# EAGLE board sketchv2.0 (EAGLE 7.6.0)
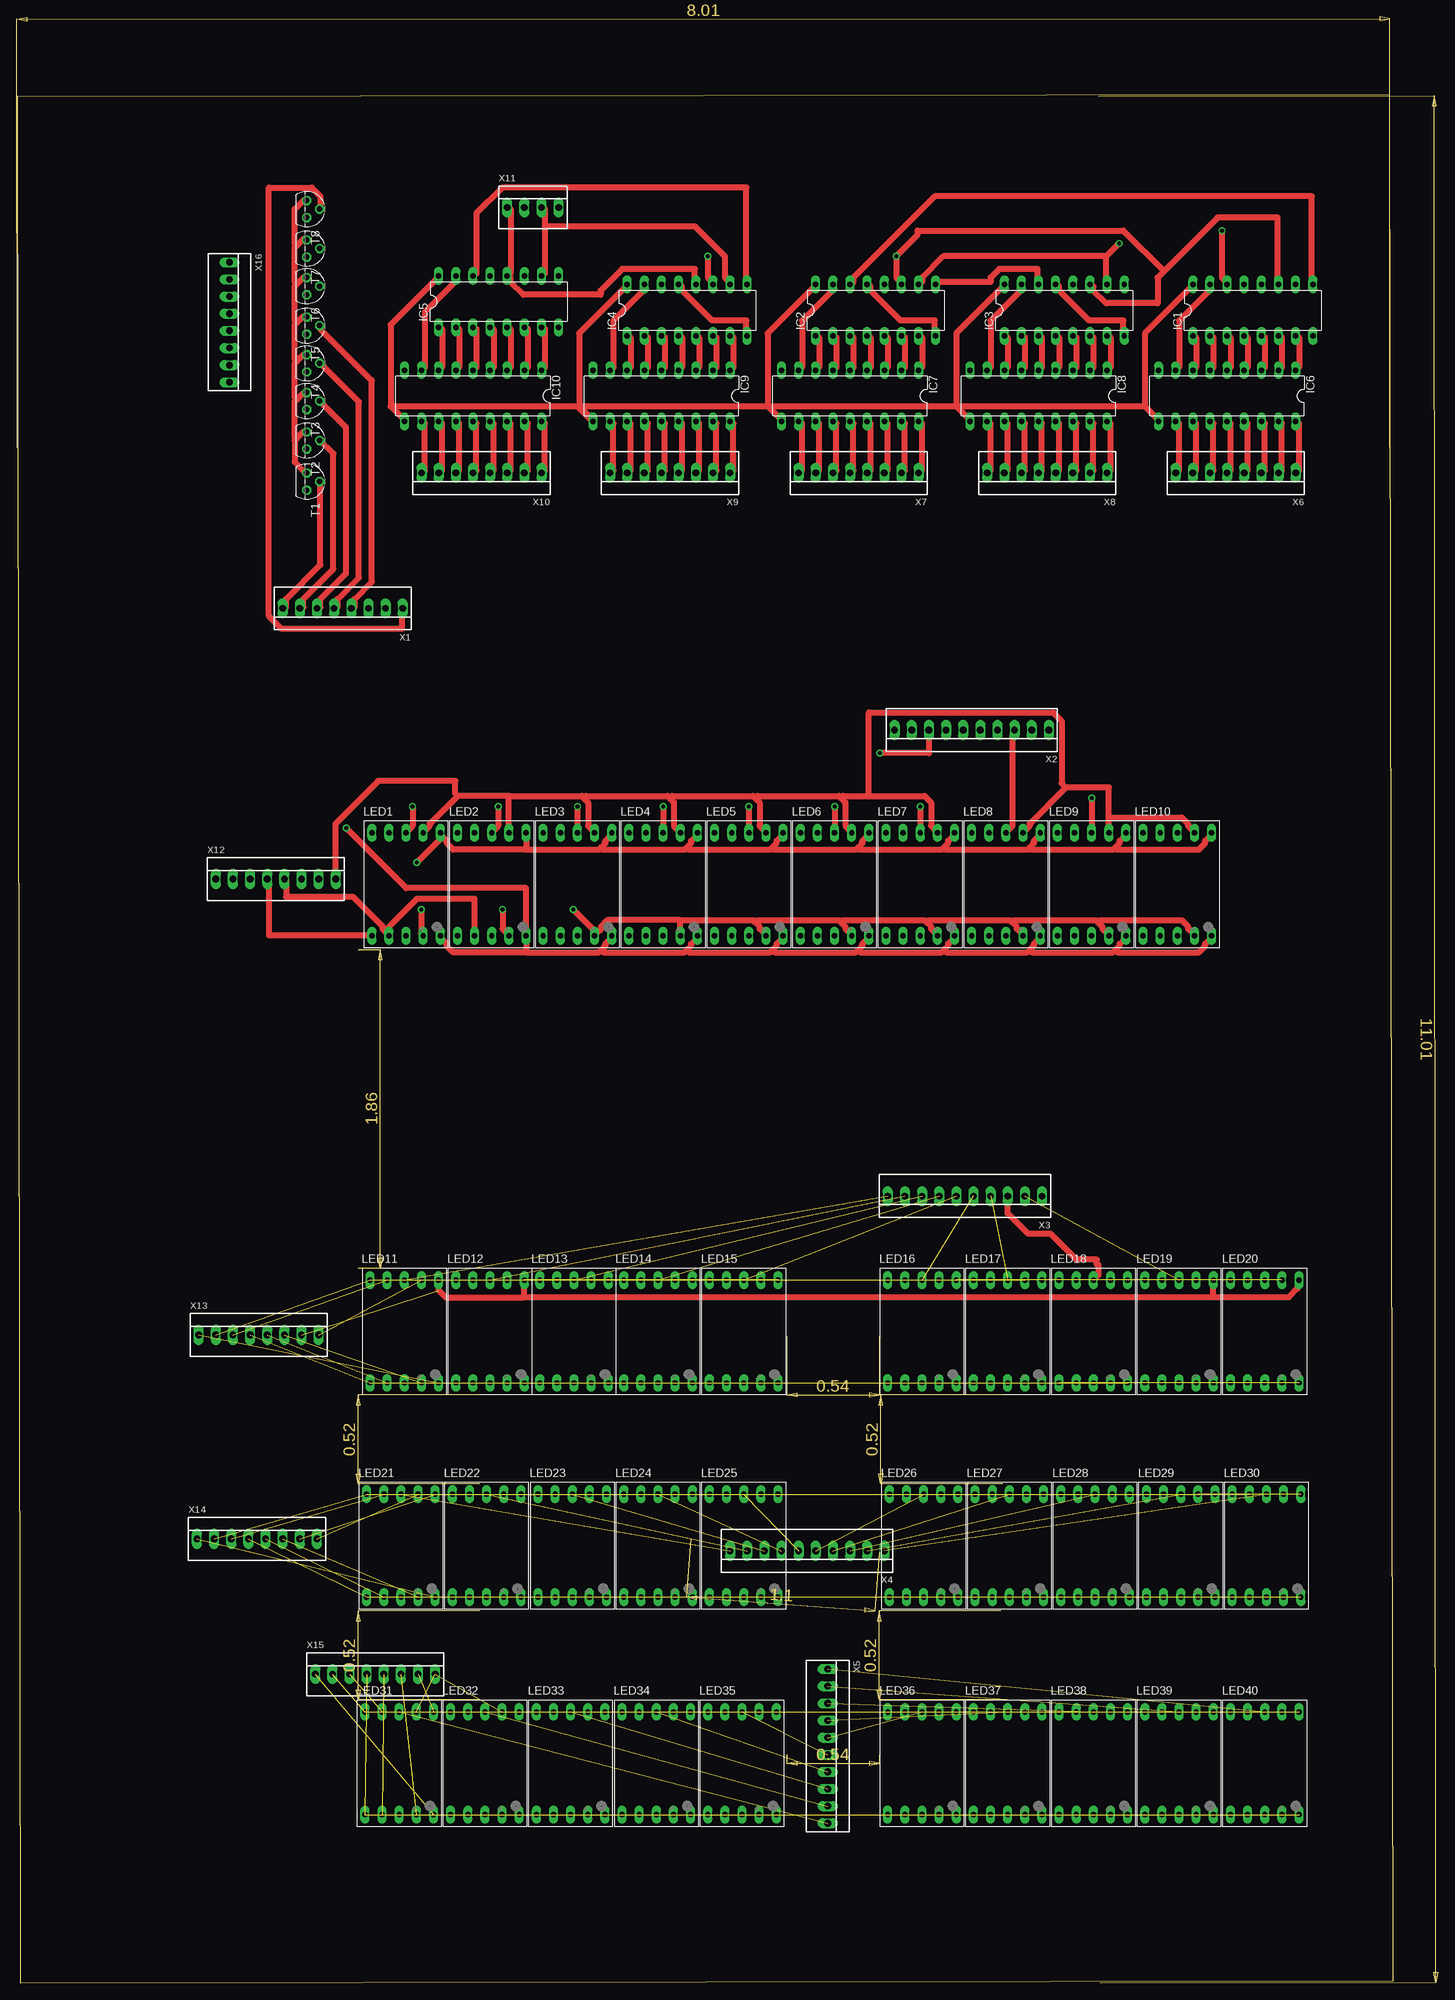
[diagram p0: board, top side]
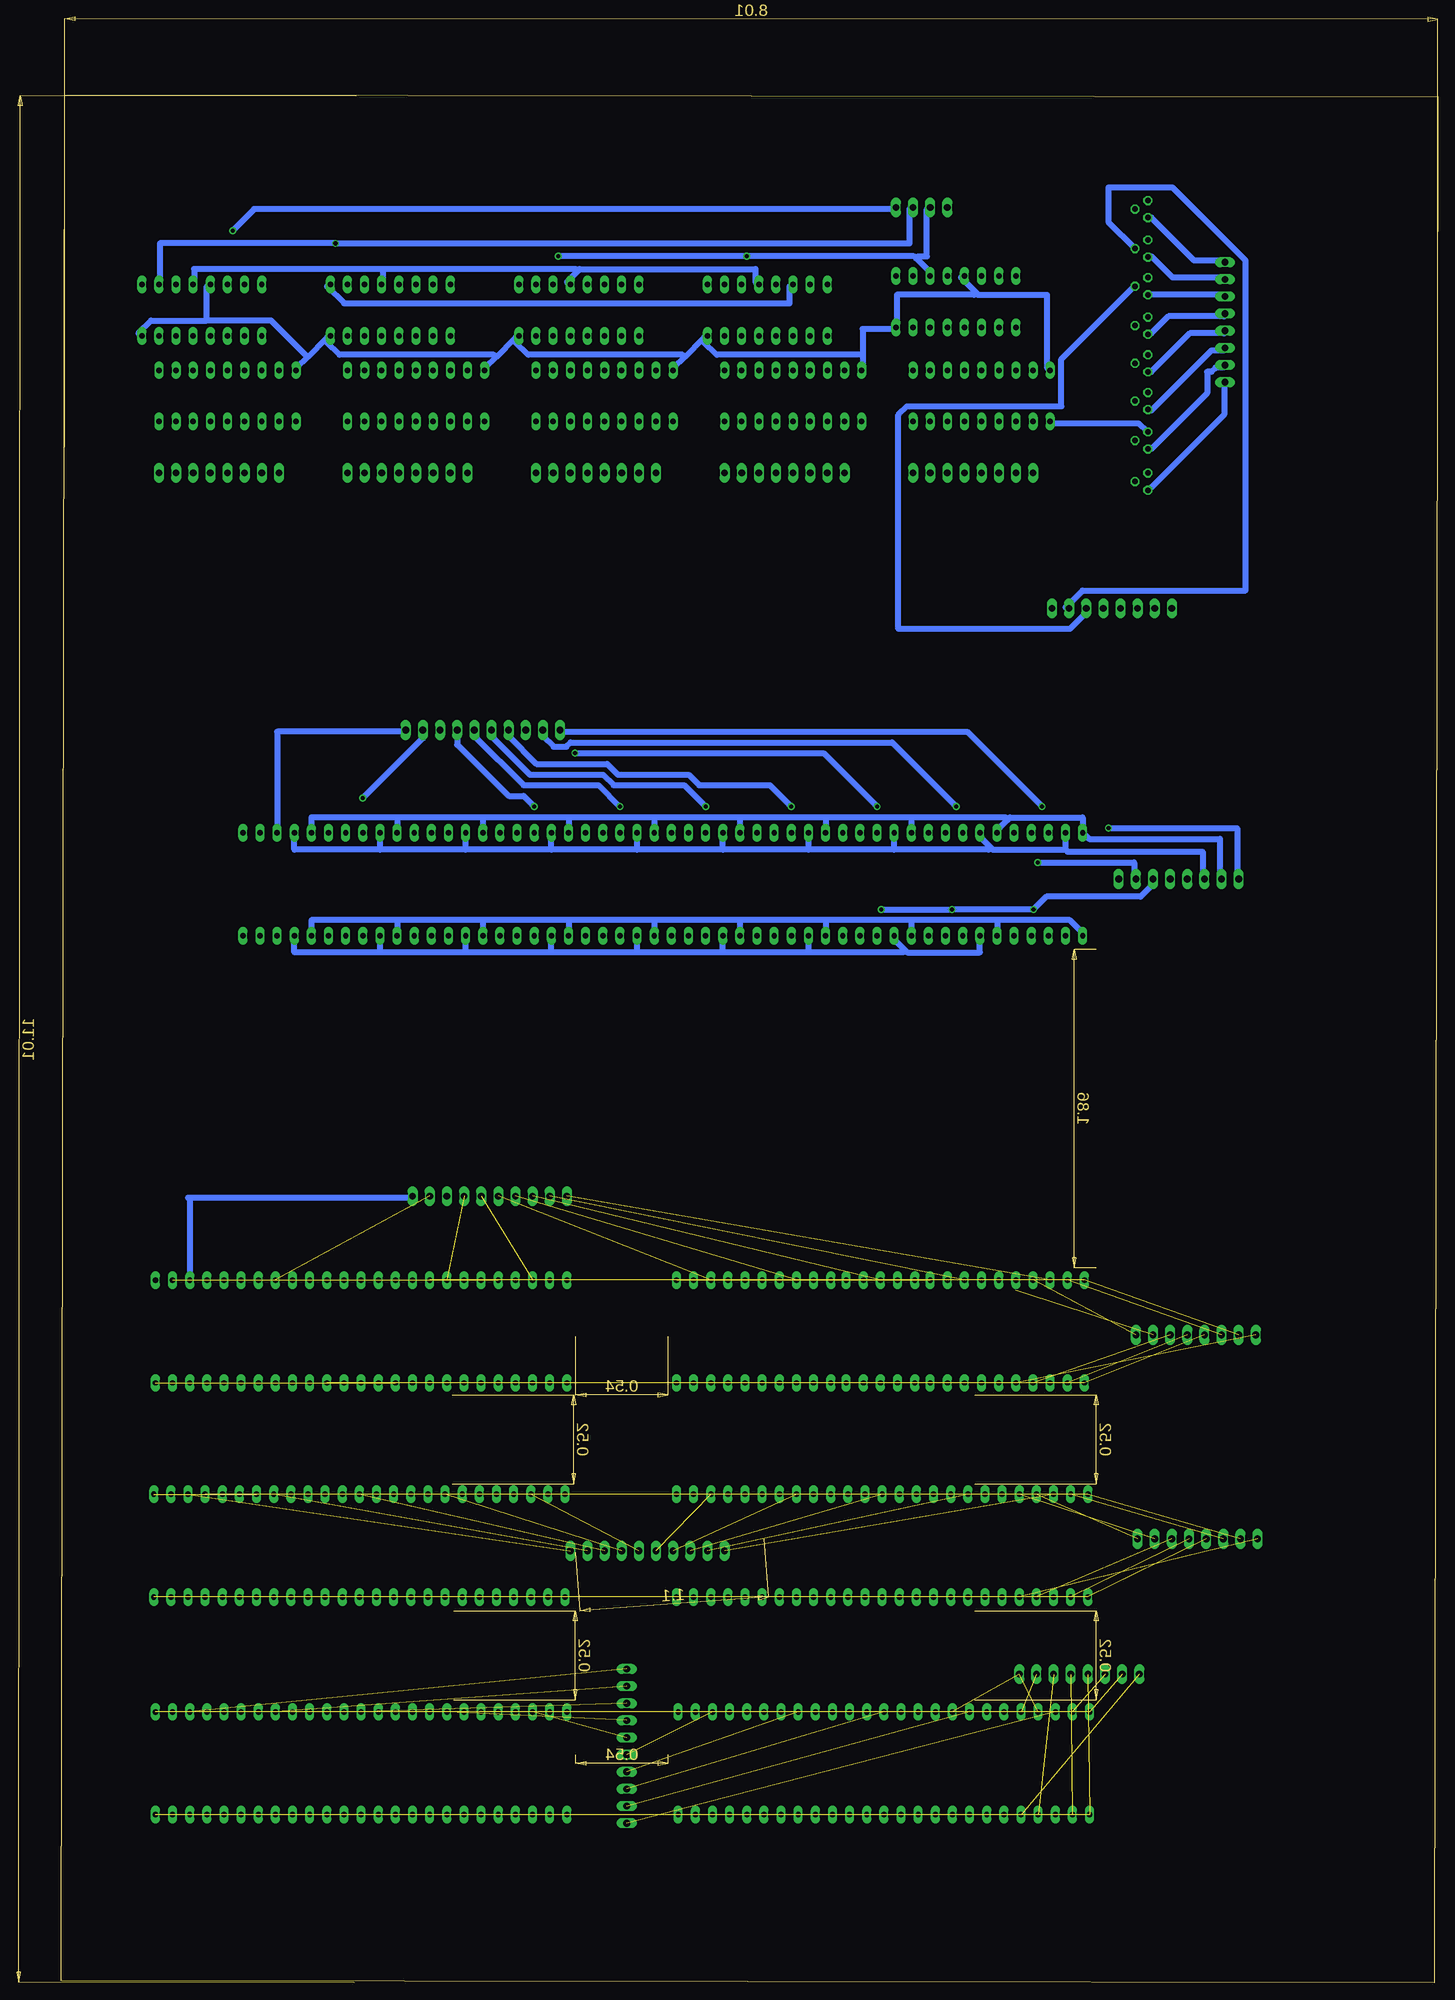
[diagram p1: board, bottom side, seen from below]

Size 203.94 x 279.83 mm. Coordinates in mm from the lower left corner, seen from the top.
Outline: 0.51,0 203.94,0.25 203.43,279.83 0,279.58 0.51,0
Copper layers (1*16): Top 0.035mm / dielectric 1.5mm / Bottom 0.035mm
Design rules "default": minimum track width 10mil, minimum drill 24mil, track to track 8mil, track to pad 8mil, pad to pad 8mil, via to via 8mil, smd to smd 8mil, copper to edge 40mil, drill to drill 8mil, minimum pad ring 10mil, minimum via ring 8mil, stop-mask expansion 4mil, vias tented up to drill 0mil, thermal gap 10mil
Net classes: 0 default: width 0.914 mm, clearance 0.457 mm
tRestrict: area 0,4.3 to 205.5,78; area 1.8,187.7 to 202.4,271.5
bRestrict: area 0,5.8 to 204,77.2; area -1.8,190.5 to 201.7,273.8

## Footprints (pad centres in the part's own frame; a part is rotated, then mirrored left to right if it is on the bottom)
DIL16 = drill 0.813 long: 1 -8.89,-3.81; 2 -6.35,-3.81; 3 -3.81,-3.81; 4 -1.27,-3.81; 5 1.27,-3.81; 6 3.81,-3.81; 7 6.35,-3.81; 8 8.89,-3.81; 9 8.89,3.81; 10 6.35,3.81; 11 3.81,3.81; 12 1.27,3.81; 13 -1.27,3.81; 14 -3.81,3.81; 15 -6.35,3.81; 16 -8.89,3.81
DIL18 = drill 0.813 long: 1 -10.16,-3.81; 2 -7.62,-3.81; 3 -5.08,-3.81; 4 -2.54,-3.81; 5 0,-3.81; 6 2.54,-3.81; 7 5.08,-3.81; 8 7.62,-3.81; 9 10.16,-3.81; 10 10.16,3.81; 11 7.62,3.81; 12 5.08,3.81; 13 2.54,3.81; 14 0,3.81; 15 -2.54,3.81; 16 -5.08,3.81; 17 -7.62,3.81; 18 -10.16,3.81
SA56-11 = drill 0.8 long: 1 -5.08,-7.62; 2 -2.54,-7.62; 3 0,-7.62; 4 2.54,-7.62; 5 5.08,-7.62; 6 5.08,7.62; 7 2.54,7.62; 8 0,7.62; 9 -2.54,7.62; 10 -5.08,7.62
TO92 = drill 0.813 octagon: 1 1.27,0; 2 0,1.905; 3 -1.27,0
22-23-2081 = drill 1 long: 1 -8.89,0; 2 -6.35,0; 3 -3.81,0; 4 -1.27,0; 5 1.27,0; 6 3.81,0; 7 6.35,0; 8 8.89,0
22-23-2101 = drill 1 long: 1 -11.43,0; 2 -8.89,0; 3 -6.35,0; 4 -3.81,0; 5 -1.27,0; 6 1.27,0; 7 3.81,0; 8 6.35,0; 9 8.89,0; 10 11.43,0
22-23-2041 = drill 1 long: 1 -3.81,0; 2 -1.27,0; 3 1.27,0; 4 3.81,0

## Placement (x,y rotation side)
IC1  74HC595N  [DIL16]  183.13,247.9 0 top
IC2  74HC595N  [DIL16]  127.25,247.9 0 top
IC3  74HC595N  [DIL16]  155.19,247.9 0 top
IC4  74HC595N  [DIL16]  99.31,247.9 0 top
IC5  74HC595N  [DIL16]  71.37,249.17 0 top
IC6  [DIL18]  179.32,235.2 180 top
IC7  [DIL18]  123.44,235.2 180 top
IC8  [DIL18]  151.38,235.2 180 top
IC9  [DIL18]  95.5,235.2 180 top
IC10  [DIL18]  67.56,235.2 180 top
LED1  7-SEG_SA56-11  [SA56-11]  57.66,162.81 0 top
LED2  7-SEG_SA56-11  [SA56-11]  70.36,162.81 0 top
LED3  7-SEG_SA56-11  [SA56-11]  83.06,162.81 0 top
LED4  7-SEG_SA56-11  [SA56-11]  95.76,162.81 0 top
LED5  7-SEG_SA56-11  [SA56-11]  108.46,162.81 0 top
LED6  7-SEG_SA56-11  [SA56-11]  121.16,162.81 0 top
LED7  7-SEG_SA56-11  [SA56-11]  133.86,162.81 0 top
LED8  7-SEG_SA56-11  [SA56-11]  146.56,162.81 0 top
LED9  7-SEG_SA56-11  [SA56-11]  159.26,162.81 0 top
LED10  7-SEG_SA56-11  [SA56-11]  171.96,162.81 0 top
LED11  7-SEG_SA56-11  [SA56-11]  57.4,96.52 0 top
LED12  7-SEG_SA56-11  [SA56-11]  70.1,96.52 0 top
LED13  7-SEG_SA56-11  [SA56-11]  82.55,96.52 0 top
LED14  7-SEG_SA56-11  [SA56-11]  95,96.52 0 top
LED15  7-SEG_SA56-11  [SA56-11]  107.7,96.52 0 top
LED16  7-SEG_SA56-11  [SA56-11]  134.11,96.52 0 top
LED17  7-SEG_SA56-11  [SA56-11]  146.81,96.52 0 top
LED18  7-SEG_SA56-11  [SA56-11]  159.51,96.52 0 top
LED19  7-SEG_SA56-11  [SA56-11]  172.21,96.52 0 top
LED20  7-SEG_SA56-11  [SA56-11]  184.91,96.52 0 top
LED21  7-SEG_SA56-11  [SA56-11]  56.9,64.77 0 top
LED22  7-SEG_SA56-11  [SA56-11]  69.6,64.77 0 top
LED23  7-SEG_SA56-11  [SA56-11]  82.3,64.77 0 top
LED24  7-SEG_SA56-11  [SA56-11]  95,64.77 0 top
LED25  7-SEG_SA56-11  [SA56-11]  107.7,64.77 0 top
LED26  7-SEG_SA56-11  [SA56-11]  134.37,64.77 0 top
LED27  7-SEG_SA56-11  [SA56-11]  147.07,64.77 0 top
LED28  7-SEG_SA56-11  [SA56-11]  159.77,64.77 0 top
LED29  7-SEG_SA56-11  [SA56-11]  172.47,64.77 0 top
LED30  7-SEG_SA56-11  [SA56-11]  185.17,64.77 0 top
LED31  7-SEG_SA56-11  [SA56-11]  56.64,32.51 0 top
LED32  7-SEG_SA56-11  [SA56-11]  69.34,32.51 0 top
LED33  7-SEG_SA56-11  [SA56-11]  82.04,32.51 0 top
LED34  7-SEG_SA56-11  [SA56-11]  94.74,32.51 0 top
LED35  7-SEG_SA56-11  [SA56-11]  107.44,32.51 0 top
LED36  7-SEG_SA56-11  [SA56-11]  134.11,32.51 0 top
LED37  7-SEG_SA56-11  [SA56-11]  146.81,32.51 0 top
LED38  7-SEG_SA56-11  [SA56-11]  159.51,32.51 0 top
LED39  7-SEG_SA56-11  [SA56-11]  172.21,32.51 0 top
LED40  7-SEG_SA56-11  [SA56-11]  184.91,32.51 0 top
T1  [TO92]  42.93,222.5 270 top
T2  [TO92]  42.93,228.6 270 top
T3  [TO92]  42.93,234.44 270 top
T4  [TO92]  42.93,240.03 270 top
T5  [TO92]  42.93,245.62 270 top
T6  [TO92]  42.93,251.46 270 top
T7  [TO92]  42.93,257.05 270 top
T8  [TO92]  42.93,262.89 270 top
X1  22-23-2081  [22-23-2081]  48.26,203.71 180 top
X2  22-23-2101  [22-23-2101]  141.48,185.67 180 top
X3  22-23-2101  [22-23-2101]  140.46,116.59 180 top
X4  22-23-2101  [22-23-2101]  117.09,64.01 180 top
X5  22-23-2101  [22-23-2101]  120.14,35.05 270 top
X6  22-23-2081  [22-23-2081]  180.59,223.77 180 top
X7  22-23-2081  [22-23-2081]  124.71,223.77 180 top
X8  22-23-2081  [22-23-2081]  152.65,223.77 180 top
X9  22-23-2081  [22-23-2081]  96.77,223.77 180 top
X10  22-23-2081  [22-23-2081]  68.83,223.77 180 top
X11  22-23-2041  [22-23-2041]  76.45,263.14 0 top
X12  22-23-2081  [22-23-2081]  38.35,163.58 0 top
X13  22-23-2081  [22-23-2081]  35.81,96.01 0 top
X14  22-23-2081  [22-23-2081]  35.56,65.79 0 top
X15  22-23-2081  [22-23-2081]  53.09,45.72 0 top
X16  22-23-2081  [22-23-2081]  31.5,246.13 270 top

## Library data of the parts
IC1-IC5 = 74xx-eu
IC6-IC10 = uln-udn
LED1-LED40 = display-kingbright-2
T1-T8 = transistor
X1 X6-X10 X12-X16 = con-molex; MF: MOLEX; MPN: 22-23-2081; OC_FARNELL: 1756826; OC_NEWARK: 01C7592
X2-X5 = con-molex; MF: MOLEX; MPN: 22-23-2101; OC_FARNELL: 1756828; OC_NEWARK: 94C0765
X11 = con-molex; MF: MOLEX; MPN: 22-23-2041; OC_FARNELL: 1462920; OC_NEWARK: 38C0355

## Nets
A: T1.1 X16.8
B: T2.1 X16.7
B1: T1.2 X1.8
B2: T2.2 X1.7
B3: T3.2 X1.6
B4: T4.2 X1.5
B5: T5.2 X1.4
B6: T6.2 X1.3
B7: T7.2 X1.2
B8: T8.2 X1.1
C: T3.1 X16.6
D: T4.1 X16.5
DS: IC1.14 X11.4
E: T5.1 X16.4
F: T6.1 X16.3
G: T7.1 X16.2
GND: IC1.8 IC1.13 IC2.8 IC2.13 IC3.8 IC3.13 IC4.8 IC4.13 IC5.8 IC5.13 IC6.9 IC7.9 IC8.9 IC9.9 IC10.9
H: T8.1 X16.1
MR: IC1.10 IC2.10 IC3.10 IC4.10 IC5.10 X11.3
N$1: IC1.15 IC6.8
N$2: IC1.1 IC6.7
N$3: IC1.2 IC6.6
N$4: IC1.3 IC6.5
N$5: IC1.4 IC6.4
N$6: IC1.5 IC6.3
N$7: IC1.6 IC6.2
N$8: IC1.7 IC6.1
N$9: IC2.15 IC7.8
N$10: IC2.1 IC7.7
N$11: IC2.2 IC7.6
N$12: IC2.3 IC7.5
N$13: IC2.4 IC7.4
N$14: IC2.5 IC7.3
N$15: IC2.6 IC7.2
N$16: IC2.7 IC7.1
N$17: IC3.15 IC8.8
N$18: IC3.1 IC8.7
N$19: IC3.2 IC8.6
N$20: IC3.3 IC8.5
N$21: IC3.4 IC8.4
N$22: IC3.5 IC8.3
N$23: IC3.6 IC8.2
N$24: IC3.7 IC8.1
N$25: IC4.15 IC9.8
N$26: IC4.1 IC9.7
N$27: IC4.2 IC9.6
N$28: IC4.3 IC9.5
N$29: IC4.4 IC9.4
N$30: IC4.5 IC9.3
N$31: IC4.6 IC9.2
N$32: IC4.7 IC9.1
N$33: IC5.15 IC10.8
N$34: IC5.1 IC10.7
N$35: IC5.2 IC10.6
N$36: IC5.3 IC10.5
N$37: IC5.4 IC10.4
N$38: IC5.5 IC10.3
N$39: IC5.6 IC10.2
N$40: IC5.7 IC10.1
N$41: IC1.9 IC2.14
N$42: IC6.11 X6.8
N$43: IC6.12 X6.7
N$44: IC6.13 X6.6
N$45: IC6.14 X6.5
N$46: IC6.15 X6.4
N$47: IC6.16 X6.3
N$48: IC6.17 X6.2
N$49: IC6.18 X6.1
N$50: IC7.11 X7.8
N$51: IC7.12 X7.7
N$52: IC7.13 X7.6
N$53: IC7.14 X7.5
N$54: IC7.15 X7.4
N$55: IC7.16 X7.3
N$56: IC7.17 X7.2
N$57: IC7.18 X7.1
N$58: IC8.11 X8.8
N$59: IC8.12 X8.7
N$60: IC8.13 X8.6
N$61: IC8.14 X8.5
N$62: IC8.15 X8.4
N$63: IC8.16 X8.3
N$64: IC8.17 X8.2
N$65: IC8.18 X8.1
N$66: IC9.11 X9.8
N$67: IC9.12 X9.7
N$68: IC9.13 X9.6
N$69: IC9.14 X9.5
N$70: IC9.15 X9.4
N$71: IC9.16 X9.3
N$72: IC9.17 X9.2
N$73: IC9.18 X9.1
N$74: IC10.11 X10.8
N$75: IC10.12 X10.7
N$76: IC10.13 X10.6
N$77: IC10.14 X10.5
N$78: IC10.15 X10.4
N$79: IC10.16 X10.3
N$80: IC10.17 X10.2
N$81: IC10.18 X10.1
N$103: IC2.9 IC3.14
N$112: IC3.9 IC4.14
N$121: IC4.9 IC5.14
R1A: LED1.7 LED2.7 LED3.7 LED4.7 LED5.7 LED6.7 LED7.7 LED8.7 LED9.7 LED10.7 X12.8
R1B: LED1.6 LED2.6 LED3.6 LED4.6 LED5.6 LED6.6 LED7.6 LED8.6 LED9.6 LED10.6 X12.7
R1C: LED1.4 LED2.4 LED3.4 LED4.4 LED5.4 LED6.4 LED7.4 LED8.4 LED9.4 LED10.4 X12.6
R1D: LED1.2 LED2.2 LED3.2 LED4.2 LED5.2 LED6.2 LED7.2 LED8.2 LED9.2 LED10.2 X12.5
R1E: LED1.1 LED2.1 LED3.1 LED4.1 LED5.1 LED6.1 LED7.1 LED8.1 LED9.1 LED10.1 X12.4
R1F: LED1.9 LED2.9 LED3.9 LED4.9 LED5.9 LED6.9 LED7.9 LED8.9 LED9.9 LED10.9 X12.3
R1G: LED1.10 LED2.10 LED3.10 LED4.10 LED5.10 LED6.10 LED7.10 LED8.10 LED9.10 LED10.10 X12.2
R1H: LED1.5 LED2.5 LED3.5 LED4.5 LED5.5 LED6.5 LED7.5 LED8.5 LED9.5 LED10.5 X12.1
R2A: LED11.7 LED12.7 LED13.7 LED14.7 LED15.7 LED16.7 LED17.7 LED18.7 LED19.7 LED20.7 X13.8
R2B: LED11.6 LED12.6 LED13.6 LED14.6 LED15.6 LED16.6 LED17.6 LED18.6 LED19.6 LED20.6 X13.7
R2C: LED11.4 LED12.4 LED13.4 LED14.4 LED15.4 LED16.4 LED17.4 LED18.4 LED19.4 LED20.4 X13.6
R2D: LED11.2 LED12.2 LED13.2 LED14.2 LED15.2 LED16.2 LED17.2 LED18.2 LED19.2 LED20.2 X13.5
R2E: LED11.1 LED12.1 LED13.1 LED14.1 LED15.1 LED16.1 LED17.1 LED18.1 LED19.1 LED20.1 X13.4
R2F: LED11.9 LED12.9 LED13.9 LED14.9 LED15.9 LED16.9 LED17.9 LED18.9 LED19.9 LED20.9 X13.3
R2G: LED11.10 LED12.10 LED13.10 LED14.10 LED15.10 LED16.10 LED17.10 LED18.10 LED19.10 LED20.10 X13.2
R2H: LED11.5 LED12.5 LED13.5 LED14.5 LED15.5 LED16.5 LED17.5 LED18.5 LED19.5 LED20.5 X13.1
R3A: LED21.7 LED22.7 LED23.7 LED24.7 LED25.7 LED26.7 LED27.7 LED28.7 LED29.7 LED30.7 X14.8
R3B: LED21.6 LED22.6 LED23.6 LED24.6 LED25.6 LED26.6 LED27.6 LED28.6 LED29.6 LED30.6 X14.7
R3C: LED21.4 LED22.4 LED23.4 LED24.4 LED25.4 LED26.4 LED27.4 LED28.4 LED29.4 LED30.4 X14.6
R3D: LED21.2 LED22.2 LED23.2 LED24.2 LED25.2 LED26.2 LED27.2 LED28.2 LED29.2 LED30.2 X14.5
R3E: LED21.1 LED22.1 LED23.1 LED24.1 LED25.1 LED26.1 LED27.1 LED28.1 LED29.1 LED30.1 X14.4
R3F: LED21.9 LED22.9 LED23.9 LED24.9 LED25.9 LED26.9 LED27.9 LED28.9 LED29.9 LED30.9 X14.3
R3G: LED21.10 LED22.10 LED23.10 LED24.10 LED25.10 LED26.10 LED27.10 LED28.10 LED29.10 LED30.10 X14.2
R3H: LED21.5 LED22.5 LED23.5 LED24.5 LED25.5 LED26.5 LED27.5 LED28.5 LED29.5 LED30.5 X14.1
R4A: LED31.7 LED32.7 LED33.7 LED34.7 LED35.7 LED36.7 LED37.7 LED38.7 LED39.7 LED40.7 X15.8
R4B: LED31.6 LED32.6 LED33.6 LED34.6 LED35.6 LED36.6 LED37.6 LED38.6 LED39.6 LED40.6 X15.7
R4C: LED31.4 LED32.4 LED33.4 LED34.4 LED35.4 LED36.4 LED37.4 LED38.4 LED39.4 LED40.4 X15.6
R4D: LED31.2 LED32.2 LED33.2 LED34.2 LED35.2 LED36.2 LED37.2 LED38.2 LED39.2 LED40.2 X15.5
R4E: LED31.1 LED32.1 LED33.1 LED34.1 LED35.1 LED36.1 LED37.1 LED38.1 LED39.1 LED40.1 X15.4
R4F: LED31.9 LED32.9 LED33.9 LED34.9 LED35.9 LED36.9 LED37.9 LED38.9 LED39.9 LED40.9 X15.3
R4G: LED31.10 LED32.10 LED33.10 LED34.10 LED35.10 LED36.10 LED37.10 LED38.10 LED39.10 LED40.10 X15.2
R4H: LED31.5 LED32.5 LED33.5 LED34.5 LED35.5 LED36.5 LED37.5 LED38.5 LED39.5 LED40.5 X15.1
SEG1: LED1.8 X2.10
SEG2: LED2.8 X2.9
SEG3: LED3.8 X2.8
SEG4: LED4.8 X2.7
SEG5: LED5.8 X2.6
SEG6: LED6.8 X2.5
SEG7: LED7.8 X2.4
SEG8: LED8.8 X2.3
SEG9: LED9.8 X2.2
SEG10: LED10.8 X2.1
SEG11: LED11.8 X3.10
SEG12: LED12.8 X3.9
SEG13: LED13.8 X3.8
SEG14: LED14.8 X3.7
SEG15: LED15.8 X3.6
SEG16: LED16.8 X3.5
SEG17: LED17.8 X3.4
SEG18: LED18.8 X3.3
SEG19: LED19.8 X3.2
SEG20: LED20.8 X3.1
SEG21: LED21.8 X4.10
SEG22: LED22.8 X4.9
SEG23: LED23.8 X4.8
SEG24: LED24.8 X4.7
SEG25: LED25.8 X4.6
SEG26: LED26.8 X4.5
SEG27: LED27.8 X4.4
SEG28: LED28.8 X4.3
SEG29: LED29.8 X4.2
SEG30: LED30.8 X4.1
SEG31: LED31.8 X5.10
SEG32: LED32.8 X5.9
SEG33: LED33.8 X5.8
SEG34: LED34.8 X5.7
SEG35: LED35.8 X5.6
SEG36: LED36.8 X5.5
SEG37: LED37.8 X5.4
SEG38: LED38.8 X5.3
SEG39: LED39.8 X5.2
SEG40: LED40.8 X5.1
SH_CP: IC1.11 IC2.11 IC3.11 IC4.11 IC5.11 X11.2
ST_CP: IC1.12 IC2.12 IC3.12 IC4.12 IC5.12 X11.1
VCC: IC1.16 IC2.16 IC3.16 IC4.16 IC5.16 IC6.10 IC7.10 IC8.10 IC9.10 IC10.10 T1.3 T2.3 T3.3 T4.3 T5.3 T6.3 T7.3 T8.3

## Tracks (layer width: path | path; a pad name or v marks a point on that pad's centre or on a via)
A
  Bottom 0.914: T1.1 42.42,221.62 31.62,232.41 31.62,236.85 X16.8
B
  Bottom 0.914: T2.1 42.42,227.33 34.16,235.59 34.16,238.76 33.53,238.76 32.89,239.4 31.62,239.4 X16.7
B1
  Top 0.914: T1.2 44.96,222.25 44.96,210.19 39.88,205.1 39.88,203.84 X1.8
B2
  Top 0.914: T2.2 44.96,228.6 46.86,226.69 46.86,209.55 42.42,205.1 42.42,203.84 X1.7
B3
  Top 0.914: T3.2 48.77,230.5 48.77,208.91 44.96,205.1 44.96,203.84 X1.6
B4
  Top 0.914: T4.2 44.96,240.03 50.67,234.31 50.67,208.28 47.5,205.1 47.5,203.84 X1.5
B5
  Top 0.914: T5.2 44.96,245.11 52.58,237.49 52.58,207.65 50.04,205.1 50.04,203.84 X1.4
B6
  Bottom 0.914: T6.2 44.96,251.46 55.75,240.66 55.75,233.68 78.61,233.68 79.88,232.41 79.88,200.66 54.48,200.66 51.94,203.2 X1.3
B7
  Bottom 0.914: T7.2 48.77,260.99 48.77,266.06 39.24,266.06 28.45,255.27 28.45,206.38 52.58,206.38 55.12,203.84 X1.2
B8
  Top 0.914: T8.2 44.96,262.89 44.96,264.8 43.69,266.06 37.34,266.06 37.34,202.56 39.24,200.66 57.02,200.66 57.02,203.2 X1.1
C
  Bottom 0.914: T3.1 42.42,233.04 33.53,241.94 31.62,241.94 X16.6
D
  Bottom 0.914: T4.1 42.42,238.76 36.7,244.47 31.62,244.47 X16.5
DS  (via drill 0.61)
  Top 0.914: v178.56,259.71 178.56,252.73 179.2,252.09 IC1.14
  Bottom 0.914: v178.56,259.71 175.39,262.89 80.77,262.89 X11.4
E
  Bottom 0.914: T5.1 42.42,244.47 39.88,247.01 31.62,247.01 X16.4
F
  Bottom 0.914: T6.1 31.62,250.19 X16.3
G
  Bottom 0.914: T7.1 42.42,255.91 39.24,252.73 31.62,252.73 X16.2
GND
  Top 0.914: IC3.13 154.43,251.46 154.43,250.82 158.88,246.38 163.96,246.38 163.96,244.47 IC3.8 | IC2.13 126.49,251.46 126.49,250.82 130.94,246.38 136.02,246.38 136.02,244.47 IC2.8 | IC4.13 98.55,251.46 98.55,250.82 103,246.38 108.08,246.38 108.08,244.47 IC4.8
  Bottom 0.914: 182.37,246.38 182.37,251.46 IC1.13 | 182.37,246.38 190.63,246.38 192.53,244.47 IC1.8 | 167.45,240.98 169.04,239.4 IC6.9 | 167.45,240.98 164.59,243.84 IC3.8 164.59,243.21 162.69,241.3 139.83,241.3 139.51,240.98 | 182.37,246.38 172.85,246.38 167.45,240.98 | 139.51,240.98 141.1,239.4 IC8.9 | 139.51,240.98 136.65,243.84 IC2.8 136.65,243.21 134.75,241.3 111.89,241.3 111.57,240.98 | 111.57,240.98 113.16,239.4 IC7.9 | 111.57,240.98 108.71,243.84 IC4.8 108.71,243.21 106.81,241.3 85.22,241.3 | 85.22,241.3 85.22,245.11 80.77,245.11 IC5.8 80.14,245.75 80.14,250.19 68.71,250.19 68.39,250.51 | 85.22,241.3 85.22,239.4 IC9.9 | 68.39,250.51 70.61,252.73 IC5.13 | 68.39,250.51 68.07,250.19 57.91,250.19 57.91,239.4 IC10.9
H
  Bottom 0.914: T8.1 42.42,261.62 36.07,255.27 31.62,255.27 X16.1
MR  (via drill 0.61)
  Top 0.914: 78.23,260.35 100.46,260.35 104.9,255.91 104.9,252.73 105.54,252.09 IC4.10 | 78.23,260.35 78.23,262.89 X11.3 | 78.23,260.35 78.23,253.37 IC5.10 | 161.42,255.91 137.29,255.91 134.11,252.73 134.11,252.09 IC2.10 | 161.42,255.91 161.42,252.09 IC3.10 | 161.42,255.91 v163.32,257.81
  Bottom 0.914: IC1.10 189.36,252.09 189.36,257.81 v163.32,257.81 78.23,257.81 78.23,262.89 X11.3
N$1
  Top 0.914: IC6.8 172.21,239.4 172.21,246.38 176.66,250.82 176.66,251.46 IC1.15
N$2
  Top 0.914: IC6.7 174.75,239.4 174.75,243.84 IC1.1
N$3
  Top 0.914: IC6.6 177.29,239.4 177.29,243.84 IC1.2
N$4
  Top 0.914: IC6.5 179.83,239.4 179.83,243.84 IC1.3
N$5
  Top 0.914: IC6.4 182.37,239.4 182.37,243.84 IC1.4
N$6
  Top 0.914: IC6.3 184.91,239.4 184.91,243.84 IC1.5
N$7
  Top 0.914: IC6.2 187.45,239.4 187.45,243.84 IC1.6
N$8
  Top 0.914: IC6.1 189.99,239.4 189.99,243.84 IC1.7
N$9
  Top 0.914: IC7.8 116.33,239.4 116.33,246.38 120.78,250.82 120.78,251.46 IC2.15
N$10
  Top 0.914: IC7.7 118.87,239.4 118.87,243.84 IC2.1
N$11
  Top 0.914: IC7.6 121.41,239.4 121.41,243.84 IC2.2
N$12
  Top 0.914: IC7.5 123.95,239.4 123.95,243.84 IC2.3
N$13
  Top 0.914: IC7.4 126.49,239.4 126.49,243.84 IC2.4
N$14
  Top 0.914: IC7.3 129.03,239.4 129.03,243.84 IC2.5
N$15
  Top 0.914: IC7.2 131.57,239.4 131.57,243.84 IC2.6
N$16
  Top 0.914: IC7.1 134.11,239.4 134.11,243.84 IC2.7
N$17
  Top 0.914: IC8.8 144.27,239.4 144.27,246.38 148.72,250.82 148.72,251.46 IC3.15
N$18
  Top 0.914: IC8.7 146.81,239.4 146.81,243.84 IC3.1
N$19
  Top 0.914: IC8.6 149.35,239.4 149.35,243.84 IC3.2
N$20
  Top 0.914: IC8.5 151.89,239.4 151.89,243.84 IC3.3
N$21
  Top 0.914: IC8.4 154.43,239.4 154.43,243.84 IC3.4
N$22
  Top 0.914: IC8.3 156.97,239.4 156.97,243.84 IC3.5
N$23
  Top 0.914: IC8.2 159.51,239.4 159.51,243.84 IC3.6
N$24
  Top 0.914: IC8.1 162.05,239.4 162.05,243.84 IC3.7
N$25
  Top 0.914: IC9.8 88.39,239.4 88.39,246.38 92.84,250.82 92.84,251.46 IC4.15
N$26
  Top 0.914: IC9.7 90.93,239.4 90.93,243.84 IC4.1
N$27
  Top 0.914: IC9.6 93.47,239.4 93.47,243.84 IC4.2
N$28
  Top 0.914: IC9.5 96.01,239.4 96.01,243.84 IC4.3
N$29
  Top 0.914: IC9.4 98.55,239.4 98.55,243.84 IC4.4
N$30
  Top 0.914: IC9.3 101.09,239.4 101.09,243.84 IC4.5
N$31
  Top 0.914: IC9.2 103.63,239.4 103.63,243.84 IC4.6
N$32
  Top 0.914: IC9.1 106.17,239.4 106.17,243.84 IC4.7
N$33
  Top 0.914: IC10.8 60.45,239.4 60.45,247.65 64.9,252.09 64.9,252.73 IC5.15
N$34
  Top 0.914: IC10.7 62.99,239.4 62.99,245.11 IC5.1
N$35
  Top 0.914: IC10.6 65.53,239.4 65.53,245.11 IC5.2
N$36
  Top 0.914: IC10.5 68.07,239.4 68.07,245.11 IC5.3
N$37
  Top 0.914: IC10.4 70.61,239.4 70.61,245.11 IC5.4
N$38
  Top 0.914: IC10.3 73.15,239.4 73.15,245.11 IC5.5
N$39
  Top 0.914: IC10.2 75.69,239.4 75.69,245.11 IC5.6
N$40
  Top 0.914: IC10.1 78.23,239.4 78.23,245.11 IC5.7
N$41
  Top 0.914: IC2.14 123.95,252.09 123.95,252.73 136.02,264.8 191.9,264.8 191.9,252.09 IC1.9
N$42
  Top 0.914: IC6.11 172.21,231.14 172.21,224.16 X6.8
N$43
  Top 0.914: IC6.12 174.75,231.14 174.75,224.16 X6.7
N$44
  Top 0.914: IC6.13 177.29,231.14 177.29,224.16 X6.6
N$45
  Top 0.914: IC6.14 179.83,231.14 179.83,224.16 X6.5
N$46
  Top 0.914: IC6.15 182.37,231.14 182.37,224.16 X6.4
N$47
  Top 0.914: IC6.16 184.91,231.14 184.91,224.16 X6.3
N$48
  Top 0.914: IC6.17 187.45,231.14 187.45,224.16 X6.2
N$49
  Top 0.914: IC6.18 189.99,231.14 189.99,224.16 X6.1
N$50
  Top 0.914: IC7.11 116.33,231.14 116.33,224.16 X7.8
N$51
  Top 0.914: IC7.12 118.87,231.14 118.87,224.16 X7.7
N$52
  Top 0.914: IC7.13 121.41,231.14 121.41,224.16 X7.6
N$53
  Top 0.914: IC7.14 123.95,231.14 123.95,224.16 X7.5
N$54
  Top 0.914: IC7.15 126.49,231.14 126.49,224.16 X7.4
N$55
  Top 0.914: IC7.16 129.03,231.14 129.03,224.16 X7.3
N$56
  Top 0.914: IC7.17 131.57,231.14 131.57,224.16 X7.2
N$57
  Top 0.914: IC7.18 134.11,231.14 134.11,224.16 X7.1
N$58
  Top 0.914: IC8.11 144.27,231.14 144.27,224.16 X8.8
N$59
  Top 0.914: IC8.12 146.81,231.14 146.81,224.16 X8.7
N$60
  Top 0.914: IC8.13 149.35,231.14 149.35,224.16 X8.6
N$61
  Top 0.914: IC8.14 151.89,231.14 151.89,224.16 X8.5
N$62
  Top 0.914: IC8.15 154.43,231.14 154.43,224.16 X8.4
N$63
  Top 0.914: IC8.16 156.97,231.14 156.97,224.16 X8.3
N$64
  Top 0.914: IC8.17 159.51,231.14 159.51,224.16 X8.2
N$65
  Top 0.914: IC8.18 162.05,231.14 162.05,224.16 X8.1
N$66
  Top 0.914: IC9.11 88.39,231.14 88.39,224.16 X9.8
N$67
  Top 0.914: IC9.12 90.93,231.14 90.93,224.16 X9.7
N$68
  Top 0.914: IC9.13 93.47,231.14 93.47,224.16 X9.6
N$69
  Top 0.914: IC9.14 96.01,231.14 96.01,224.16 X9.5
N$70
  Top 0.914: IC9.15 98.55,231.14 98.55,224.16 X9.4
N$71
  Top 0.914: IC9.16 101.09,231.14 101.09,224.16 X9.3
N$72
  Top 0.914: IC9.17 103.63,231.14 103.63,224.16 X9.2
N$73
  Top 0.914: IC9.18 106.17,231.14 106.17,224.16 X9.1
N$74
  Top 0.914: IC10.11 60.45,231.14 60.45,224.16 X10.8
N$75
  Top 0.914: IC10.12 62.99,231.14 62.99,224.16 X10.7
N$76
  Top 0.914: IC10.13 65.53,231.14 65.53,224.16 X10.6
N$77
  Top 0.914: IC10.14 68.07,231.14 68.07,224.16 X10.5
N$78
  Top 0.914: IC10.15 70.61,231.14 70.61,224.16 X10.4
N$79
  Top 0.914: IC10.16 73.15,231.14 73.15,224.16 X10.3
N$80
  Top 0.914: IC10.17 75.69,231.14 75.69,224.16 X10.2
N$81
  Top 0.914: IC10.18 78.23,231.14 78.23,224.16 X10.1
N$103
  Top 0.914: IC2.9 136.65,252.09 144.27,252.09 144.27,252.73 145.54,254 151.26,254 151.26,252.09 IC3.14
N$112
  Bottom 0.914: IC4.14 96.01,251.46 96.01,248.92 162.05,248.92 164.59,251.46 IC3.9
N$121
  Top 0.914: IC5.14 68.07,253.37 68.07,262.25 71.88,266.06 108.08,266.06 108.08,252.09 IC4.9
R1A
  Top 0.914: 155.45,177.16 150.05,171.77 150.05,171.45 149.1,170.5 LED8.7 | 155.45,177.16 161.8,177.16 161.8,172.72 | LED9.7 161.8,172.72 | 161.8,172.72 172.59,172.72 173.55,171.77 173.55,171.45 174.5,170.5 LED10.7 | 65.28,175.9 61.15,171.77 61.15,171.45 60.2,170.5 LED1.7 | 72.9,175.9 65.28,175.9 | LED2.7 72.9,175.9 | 84.01,175.58 83.69,175.9 72.9,175.9 | 84.01,175.58 84.65,174.94 84.65,171.45 85.6,170.5 LED3.7 | 96.71,175.58 96.39,175.9 84.33,175.9 84.01,175.58 | 96.71,175.58 97.35,174.94 97.35,171.45 98.3,170.5 LED4.7 | 109.41,175.58 109.09,175.9 97.03,175.9 96.71,175.58 | 109.41,175.58 110.05,174.94 110.05,171.45 111,170.5 LED5.7 | 122.11,175.58 121.79,175.9 109.73,175.9 109.41,175.58 | 122.11,175.58 122.74,174.94 122.74,171.45 123.7,170.5 LED6.7 | 126.24,175.9 122.43,175.9 122.11,175.58 | 126.24,175.9 134.49,175.9 135.45,174.94 135.45,171.45 136.4,170.5 LED7.7 | X12.8 47.18,163.83 47.18,171.77 53.53,178.12 64.96,178.12 64.96,176.21 65.28,175.9 | 126.24,175.9 126.24,188.28 153.54,188.28 154.81,187.01 154.81,177.8 155.45,177.16
R1B  (via drill 0.61)
  Top 0.914: 75.44,167.96 64.64,167.96 63.69,168.91 63.69,169.23 62.74,170.18 LED1.6 62.74,169.54 v59.25,166.05 | LED2.6 75.44,167.96 | 86.55,168.28 86.23,167.96 75.44,167.96 | 86.55,168.28 87.19,168.91 87.19,169.23 88.14,170.18 LED3.6 | 99.25,168.28 98.93,167.96 86.87,167.96 86.55,168.28 | 99.25,168.28 99.88,168.91 99.88,169.23 100.84,170.18 LED4.6 | 111.95,168.28 111.63,167.96 99.57,167.96 99.25,168.28 | 111.95,168.28 112.59,168.91 112.59,169.23 113.54,170.18 LED5.6 | 124.65,168.28 124.33,167.96 112.27,167.96 111.95,168.28 | 124.65,168.28 125.29,168.91 125.29,169.23 126.24,170.18 LED6.6 | 137.35,168.28 137.03,167.96 124.97,167.96 124.65,168.28 | 137.35,168.28 137.99,168.91 137.99,169.23 138.94,170.18 LED7.6 | 150.05,168.28 149.73,167.96 137.67,167.96 137.35,168.28 | 150.05,168.28 150.69,168.91 150.69,169.23 151.64,170.18 LED8.6 | 162.75,168.28 162.43,167.96 150.37,167.96 150.05,168.28 | 162.75,168.28 163.39,168.91 163.39,169.23 164.34,170.18 LED9.6 | LED10.6 177.04,170.18 176.09,169.23 176.09,168.91 175.13,167.96 163.07,167.96 162.75,168.28
  Bottom 0.914: v59.25,166.05 44.96,166.05 44.96,163.83 X12.7
R1C  (via drill 0.61)
  Top 0.914: v59.88,159.07 59.88,155.57 60.2,155.26 LED1.4 | v71.95,159.07 71.95,156.21 72.9,155.26 LED2.4 | 98.3,157.48 87.5,157.48 86.55,156.53 86.55,156.21 85.6,155.26 LED3.4 85.6,155.89 v82.42,159.07 | LED4.4 98.3,157.48 | 109.41,157.16 109.09,157.48 98.3,157.48 | 109.41,157.16 110.05,156.53 110.05,156.21 111,155.26 LED5.4 | 122.11,157.16 121.79,157.48 109.73,157.48 109.41,157.16 | 122.11,157.16 122.74,156.53 122.74,156.21 123.7,155.26 LED6.4 | 134.81,157.16 134.49,157.48 122.43,157.48 122.11,157.16 | 134.81,157.16 135.45,156.53 135.45,156.21 136.4,155.26 LED7.4 | 147.51,157.16 147.19,157.48 135.13,157.48 134.81,157.16 | 147.51,157.16 148.15,156.53 148.15,156.21 149.1,155.26 LED8.4 | 160.21,157.16 159.89,157.48 147.83,157.48 147.51,157.16 | 160.21,157.16 160.85,156.53 160.85,156.21 161.8,155.26 LED9.4 | LED10.4 174.5,155.26 173.55,156.21 173.55,156.53 172.59,157.48 160.53,157.48 160.21,157.16
  Bottom 0.914: X12.6 42.42,163.51 42.42,162.56 44.01,160.97 57.98,160.97 v59.88,159.07 v71.95,159.07 v82.42,159.07
R1D
  Top 0.914: X12.5 39.88,163.51 39.88,160.97 49.72,160.97 54.16,156.53 54.16,156.21 55.12,155.26 LED1.2 54.8,156.21 59.25,160.66 67.82,160.66 LED2.2
  Bottom 0.914: LED2.2 67.82,152.72 78.61,152.72 78.93,153.03 | 78.93,153.03 80.52,154.62 LED3.2 | 93.22,152.72 LED4.2 | 93.22,152.72 79.25,152.72 78.93,153.03 | 105.92,152.72 LED5.2 | 93.22,152.72 105.92,152.72 | 118.62,152.72 LED6.2 | 105.92,152.72 118.62,152.72 | 131.32,152.72 LED7.2 | 118.62,152.72 131.32,152.72 | 144.02,152.72 LED8.2 | 131.32,152.72 144.02,152.72 | 156.72,152.72 LED9.2 | 144.02,152.72 156.72,152.72 | LED10.2 169.42,152.72 156.72,152.72
R1E
  Top 0.914: LED1.1 52.58,155.26 37.34,155.26 37.34,163.51 X12.4
  Bottom 0.914: 65.28,157.48 LED2.1 | 65.28,157.48 54.48,157.48 52.58,155.57 LED1.1 | 77.98,157.48 LED3.1 | 65.28,157.48 77.98,157.48 | 90.68,157.48 LED4.1 | 77.98,157.48 90.68,157.48 | 103.38,157.48 LED5.1 | 90.68,157.48 103.38,157.48 | 116.08,157.48 LED6.1 | 103.38,157.48 116.08,157.48 | 128.78,157.48 LED7.1 | 116.08,157.48 128.78,157.48 | 141.48,157.48 LED8.1 | 128.78,157.48 141.48,157.48 | 154.18,157.48 LED9.1 | 141.48,157.48 154.18,157.48 | LED10.1 166.88,157.48 154.18,157.48
R1F
  Bottom 0.914: 55.12,167.96 LED1.9 | 55.12,167.96 65.91,167.96 66.23,168.28 | 66.23,168.28 67.82,169.86 LED2.9 | 80.52,167.96 LED3.9 | 80.52,167.96 66.55,167.96 66.23,168.28 | 93.22,167.96 LED4.9 | 80.52,167.96 93.22,167.96 | 105.92,167.96 LED5.9 | 93.22,167.96 105.92,167.96 | 118.62,167.96 LED6.9 | 105.92,167.96 118.62,167.96 | 131.32,167.96 LED7.9 | 118.62,167.96 131.32,167.96 | 144.02,167.96 LED8.9 | 131.32,167.96 144.02,167.96 | 156.72,167.96 LED9.9 | 144.02,167.96 156.72,167.96 | LED10.9 169.42,167.96 156.72,167.96 | X12.3 34.8,163.83 34.8,167.64 54.8,167.64 55.12,167.96
R1G
  Bottom 0.914: 63.69,172.4 65.28,170.81 LED2.10 | 63.69,172.4 63.37,172.72 52.58,172.72 LED1.10 52.26,170.18 51.62,169.54 32.26,169.54 32.26,163.83 X12.2 | 77.98,172.72 LED3.10 | 77.98,172.72 64.01,172.72 63.69,172.4 | 90.68,172.72 LED4.10 | 77.98,172.72 90.68,172.72 | 103.38,172.72 LED5.10 | 90.68,172.72 103.38,172.72 | 116.08,172.72 LED6.10 | 103.38,172.72 116.08,172.72 | 128.78,172.72 LED7.10 | 116.08,172.72 128.78,172.72 | 141.48,172.72 LED8.10 | 128.78,172.72 141.48,172.72 | 154.18,172.72 LED9.10 | 141.48,172.72 154.18,172.72 | LED10.10 166.88,172.72 154.18,172.72
R1H  (via drill 0.61)
  Top 0.914: 75.44,152.72 64.64,152.72 63.69,153.67 63.69,153.99 62.74,154.94 LED1.5 | 75.44,152.72 LED2.5 75.44,162.24 57.66,162.24 v48.77,171.13 | 86.55,153.03 86.23,152.72 75.44,152.72 | 86.55,153.03 87.19,153.67 87.19,153.99 88.14,154.94 LED3.5 | 99.25,153.03 98.93,152.72 86.87,152.72 86.55,153.03 | 99.25,153.03 99.88,153.67 99.88,153.99 100.84,154.94 LED4.5 | 111.95,153.03 111.63,152.72 99.57,152.72 99.25,153.03 | 111.95,153.03 112.59,153.67 112.59,153.99 113.54,154.94 LED5.5 | 124.65,153.03 124.33,152.72 112.27,152.72 111.95,153.03 | 124.65,153.03 125.29,153.67 125.29,153.99 126.24,154.94 LED6.5 | 137.35,153.03 137.03,152.72 124.97,152.72 124.65,153.03 | 137.35,153.03 137.99,153.67 137.99,153.99 138.94,154.94 LED7.5 | 150.05,153.03 149.73,152.72 137.67,152.72 137.35,153.03 | 150.05,153.03 150.69,153.67 150.69,153.99 151.64,154.94 LED8.5 | 162.75,153.03 162.43,152.72 150.37,152.72 150.05,153.03 | 162.75,153.03 163.39,153.67 163.39,153.99 164.34,154.94 LED9.5 | LED10.5 177.04,154.94 176.09,153.99 176.09,153.67 175.13,152.72 163.07,152.72 162.75,153.03
  Bottom 0.914: v48.77,171.13 29.72,171.13 29.72,163.83 X12.1
R2A  (10 unrouted)
R2B  (7 unrouted)
  Top 0.914: LED20.6 189.74,103.89 189.74,102.87 188.47,101.6 177.04,101.6 | 177.04,101.6 75.18,101.6 | LED11.6 62.48,102.62 63.5,101.6 75.18,101.6 | 75.18,101.6 LED12.6 | 177.04,101.6 177.29,101.85 LED19.6
R2C  (10 unrouted)
R2D  (10 unrouted)
R2E  (10 unrouted)
R2F  (10 unrouted)
R2G  (10 unrouted)
R2H  (10 unrouted)
R3A  (10 unrouted)
R3B  (10 unrouted)
R3C  (10 unrouted)
R3D  (10 unrouted)
R3E  (10 unrouted)
R3F  (10 unrouted)
R3G  (10 unrouted)
R3H  (10 unrouted)
R4A  (10 unrouted)
R4B  (10 unrouted)
R4C  (10 unrouted)
R4D  (10 unrouted)
R4E  (10 unrouted)
R4F  (10 unrouted)
R4G  (10 unrouted)
R4H  (10 unrouted)
SEG1  (via drill 0.61)
  Top 0.914: v58.61,174.31 58.61,171.45 57.66,170.5 LED1.8
  Bottom 0.914: v58.61,174.31 69.72,185.42 130.05,185.42 X2.10
SEG2  (via drill 0.61)
  Top 0.914: v71.31,174.31 71.31,171.45 70.36,170.5 LED2.8
  Bottom 0.914: v71.31,174.31 80.84,183.83 128.46,183.83 129.1,183.2 131,183.2 132.59,184.78 X2.9
SEG3  (via drill 0.61)
  Top 0.914: v83.06,174.31 LED3.8 | v127.82,182.25 135.13,182.25 X2.8
  Bottom 0.914: v83.06,174.31 90.99,182.25 v127.82,182.25
SEG4  (via drill 0.61)
  Top 0.914: v95.76,174.31 LED4.8
  Bottom 0.914: v95.76,174.31 98.93,177.48 109.41,177.48 111,179.07 121.48,179.07 123.06,180.66 133.54,180.66 137.67,184.78 X2.7
SEG5  (via drill 0.61)
  Top 0.914: v108.46,174.31 LED5.8
  Bottom 0.914: v108.46,174.31 111.63,177.48 122.11,177.48 123.7,179.07 134.49,179.07 140.21,184.78 X2.6
SEG6  (via drill 0.61)
  Top 0.914: v121.16,174.31 LED6.8
  Bottom 0.914: v121.16,174.31 124.33,177.48 135.45,177.48 142.75,184.78 X2.5
SEG7  (via drill 0.61)
  Top 0.914: v133.86,174.31 LED7.8
  Bottom 0.914: v133.86,174.31 135.45,175.9 137.67,175.9 145.29,183.51 X2.4
SEG8
  Top 0.914: LED8.8 146.56,170.5 147.51,171.45 147.51,185.1 147.83,185.42 X2.3
SEG9  (via drill 0.61)
  Top 0.914: v159.26,175.58 LED9.8
  Bottom 0.914: v159.26,175.58 150.37,184.47 X2.2
SEG10
  Bottom 0.914: LED10.8 171.96,185.42 152.91,185.42 X2.1
SEG11  (1 unrouted)
SEG12  (1 unrouted)
SEG13  (1 unrouted)
SEG14  (1 unrouted)
SEG15  (1 unrouted)
SEG16  (1 unrouted)
SEG17  (1 unrouted)
SEG18
  Top 0.914: LED18.8 160.27,104.9 160.27,106.43 160.02,106.43 160.02,107.19 156.97,107.19 153.16,111 149.86,111 146.81,114.05 X3.3
SEG19  (1 unrouted)
SEG20
  Bottom 0.914: X3.1 152.15,116.33 185.17,116.33 184.91,116.08 LED20.8
SEG21  (1 unrouted)
SEG22  (1 unrouted)
SEG23  (1 unrouted)
SEG24  (1 unrouted)
SEG25  (1 unrouted)
SEG26  (1 unrouted)
SEG27  (1 unrouted)
SEG28  (1 unrouted)
SEG29  (1 unrouted)
SEG30  (1 unrouted)
SEG31  (1 unrouted)
SEG32  (1 unrouted)
SEG33  (1 unrouted)
SEG34  (1 unrouted)
SEG35  (1 unrouted)
SEG36  (1 unrouted)
SEG37  (1 unrouted)
SEG38  (1 unrouted)
SEG39  (1 unrouted)
SEG40  (1 unrouted)
SH_CP  (via drill 0.61)
  Top 0.914: 169.99,253.68 177.93,261.62 186.82,261.62 186.82,252.09 IC1.11 | 169.99,253.68 169.04,252.73 169.04,248.92 161.42,248.92 159.51,250.82 159.51,251.46 IC3.11 | v102.36,255.91 102.36,252.73 103,252.09 IC4.11 | IC2.11 130.94,252.09 130.3,252.73 v130.3,255.91 133.48,259.08 133.48,259.71 163.96,259.71 169.99,253.68
  Bottom 0.914: 77.28,255.59 75.06,253.37 IC5.11 | 77.28,255.59 77.6,255.91 v102.36,255.91 v130.3,255.91 | X11.2 75.69,262.89 75.69,255.91 76.96,255.91 77.28,255.59
ST_CP
  Top 0.914: X11.1 73.15,262.89 73.15,253.37 IC5.12 73.15,252.73 73.15,252.09 75.06,250.19 86.49,250.19 86.49,250.82 89.66,254 100.46,254 100.46,252.09 IC4.12
  Bottom 0.914: 127.44,253.68 129.03,252.09 IC2.12 | 127.44,253.68 127.13,254 101.09,254 101.09,252.09 IC4.12 | 156.34,254 156.34,252.09 IC3.12 | 156.34,254 127.76,254 127.44,253.68 | 156.34,254 184.28,254 184.28,252.09 IC1.12
VCC
  Top 0.914: 167.13,233.68 169.04,231.78 IC6.10 | 167.13,233.68 167.13,244.47 174.12,251.46 IC1.16 | 139.19,233.68 139.51,233.36 | 139.51,233.36 141.1,231.78 IC8.10 | 139.19,233.68 139.19,244.47 146.18,251.46 IC3.16 | 111.25,233.68 111.57,233.36 | 111.57,233.36 113.16,231.78 IC7.10 | 111.25,233.68 111.25,244.47 118.24,251.46 IC2.16 | 83.31,233.68 83.63,233.36 | 83.63,233.36 85.22,231.78 IC9.10 83.06,233.68 | 83.31,233.68 83.31,244.47 90.3,251.46 IC4.16 | 55.69,233.36 55.37,233.68 55.37,245.75 62.36,252.73 IC5.16 | 55.69,233.36 57.28,231.78 IC10.10 | 56.01,233.68 83.06,233.68 | 83.06,233.68 83.31,233.68 | 56.01,233.68 55.69,233.36 | 111.25,233.68 83.95,233.68 83.63,233.36 | 139.19,233.68 111.89,233.68 111.57,233.36 | 167.13,233.68 139.83,233.68 139.51,233.36 | 56.01,233.68 55.63,233.68 | 41.47,228.92 42.42,229.87 T2.3 | 41.47,228.92 41.15,228.6 41.15,225.43 42.42,224.16 T1.3 | 41.47,234.63 41.15,234.31 41.15,229.24 41.47,228.92 | 41.47,234.63 42.42,235.59 T3.3 | 41.47,240.35 41.15,240.03 41.15,234.95 41.47,234.63 | 41.47,240.35 42.42,241.3 T4.3 | 41.47,246.06 41.15,245.75 41.15,240.66 41.47,240.35 | 41.47,246.06 42.42,247.01 T5.3 | 41.47,251.78 41.15,251.46 41.15,246.38 41.47,246.06 | 41.47,251.78 42.42,252.73 T6.3 | 41.47,257.49 41.15,257.18 41.15,252.09 41.47,251.78 | 41.47,257.49 42.42,258.44 T7.3 | T8.3 42.42,264.16 41.15,262.89 41.15,257.81 41.47,257.49
  Bottom 0.914: T2.3 43.05,229.87 44.32,231.14 57.02,231.14 IC10.10